# EAGLE board MJ808 clone - all driver - prod - 23mm (EAGLE 9.6.2)
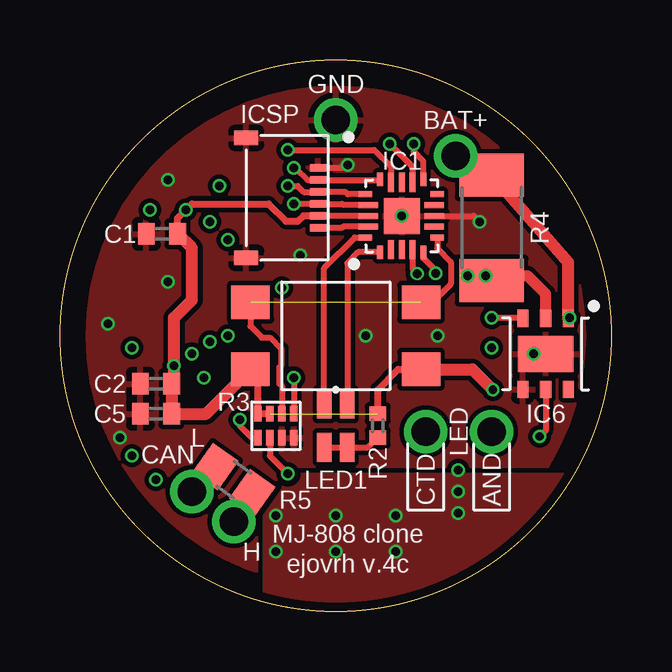
[diagram p0: board, top side]
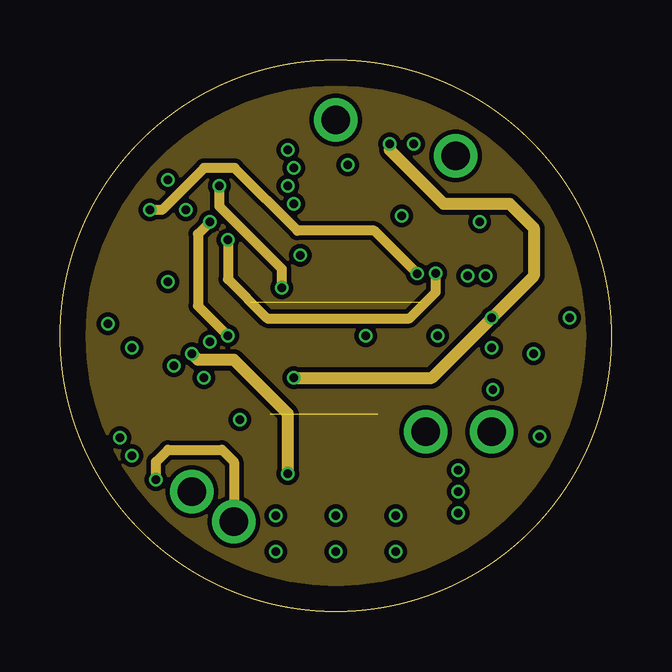
[diagram p1: board, inner layer Route2]
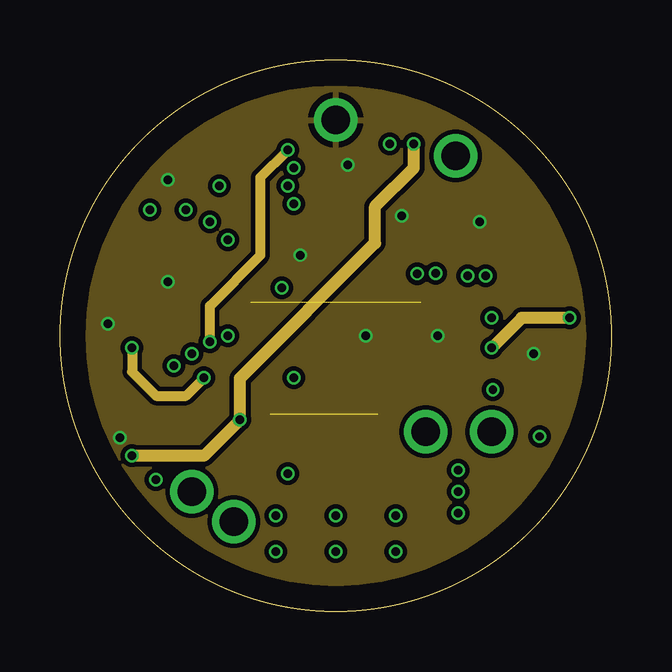
[diagram p2: board, inner layer Route15]
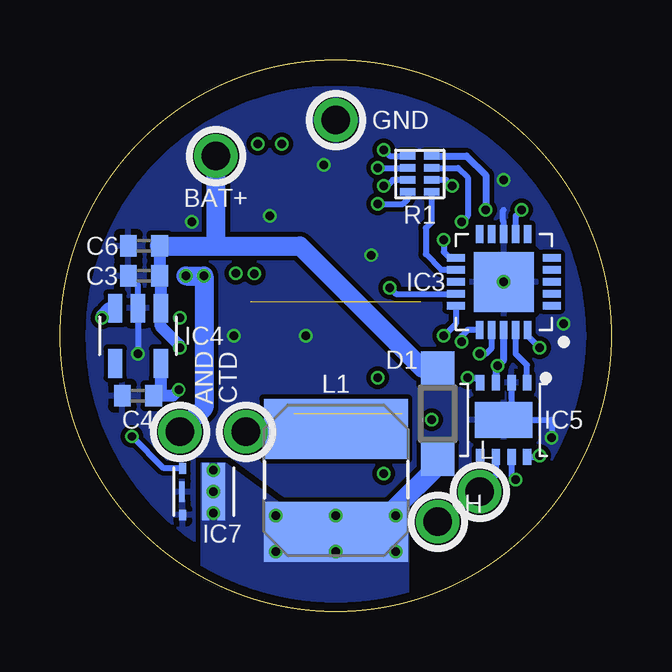
[diagram p3: board, bottom side, seen from below]

Size 23 x 23 mm. Coordinates in mm from the lower left corner, seen from the top.
Outline: circle at 11.5,11.5 radius 11.5
Copper layers (1*2*15*16): Top 0.035559375mm / dielectric 0.17018125mm / Route2 0.01778125mm / dielectric 47mil / Route15 0.01778125mm / dielectric 0.17018125mm / Bottom 0.035559375mm
Design rules "oshpark-4layer": minimum track width 5mil, minimum drill 10mil, track to track 5mil, track to pad 5mil, pad to pad 5mil, via to via 5mil, smd to smd 5mil, copper to edge 15mil, drill to drill 6mil, minimum pad ring 4mil, minimum via ring 4mil, stop-mask expansion 1.5mil, vias tented up to drill 0mil, thermal gap 10mil
Net classes: 0 GND: width 0.25 mm, drill 0.35 mm, clearance 0.19 mm; 1 BAT+: width 0.5 mm, drill 0.35 mm, clearance 0.19 mm; 2 5v0: width 0.3 mm, drill 0.35 mm, clearance 0.19 mm; 3 signal: width 0.25 mm, drill 0.35 mm, clearance 0.19 mm
bKeepout: area 0.5,0.5 to 22.5,22.5
bRestrict: area 4.5,8.8 to 5.5,9.2; area 3.5,6.8 to 5.5,7.2

## Footprints (pad centres in the part's own frame; a part is rotated, then mirrored left to right if it is on the bottom)
TH-1.2MM = drill 1.2 pad 1.8: TP$1 0,0
C0402 = smd 0.7 x 0.9: 1 -0.65,0; 2 0.65,0
SOD123 = smd 1.4 x 1.4: A 1.9,0; C -1.9,0
VQFN-20 = smd 0.55 x 0.25: 1 -1.52,0.9; 5 -1.52,-0.9; 11 1.52,-0.9; 15 1.52,0.9 | smd 0.8 x 0.25: 2 -1.4,0.45; 3 -1.4,0; 4 -1.4,-0.45; 12 1.4,-0.45; 13 1.4,0; 14 1.4,0.45 | smd 0.25 x 0.55: 6 -0.9,-1.48; 10 0.9,-1.48; 16 0.9,1.52; 20 -0.9,1.52 | smd 0.25 x 0.8: 7 -0.45,-1.35; 8 0,-1.35; 9 0.45,-1.35; 17 0.45,1.4; 18 0,1.4; 19 -0.45,1.4 | smd 1.5 x 1.5: GND 0,0
QFN20 = smd 0.3 x 0.75: !CS! 1,2; !RESET! 0.5,2; !RX0BF! 1,-2; !RX1BF! 0.5,-2; GND6 0,-2; OSC1 -0.5,-2; OSC2 -1,-2; RXCAN -1,2; TXCAN -0.5,2; VDD 0,2 | smd 0.75 x 0.3: !INT! 2,-1; !TX0RTS! -2,0.5; !TX1RTS! -2,0; !TX2RTS! -2,-1; CLKOUT -2,1; NC1 -2,-0.5; NC2 2,0; SCK 2,-0.5; SI 2,0.5; SO 2,1 | smd 2.5 x 2.5: GND 0,0
SOT-23-5L = smd 0.6 x 1.2: ADJ/NC -0.95,-1.15; EN -0.95,1.15; GND 0,1.15; IN 0.95,1.15; OUT 0.95,-1.15
DFN10 = smd 0.35 x 0.65: CANH -0.325,1.55; CANL 0.325,1.55; RXD 0.975,-1.55; SPLIT 0.975,1.55; STBY -0.975,1.55; TXD -0.975,-1.55; VDD 0.325,-1.55; VSS -0.325,-1.55 | smd 2.4 x 1.5: GND 0,0
TDFN-6-EP = smd 0.71 x 0.46: CSN -1.48,0; DIM -1.48,-0.94; DRV 1.48,0; GND1 1.48,-0.95; IN -1.48,0.94; VCC 1.48,0.95 | smd 1.5 x 2.3: GND 0,0
SC-70-6 = smd 0.45 x 0.3: 1D -0.975,0.725; 2D -0.975,0.075; 3G -0.975,-0.88; 4S 0.975,-0.88; 5D 0.975,0.075; 6D 0.975,0.725 | smd 1.5 x 0.95: D 0,0.4 | smd 0.87 x 0.23: S 0,-0.915
SMT = smd 0.3 x 0.7: 1 -1.25,1.27; 2 -0.75,1.27; 3 -0.25,1.27; 4 0.25,1.27; 5 0.75,1.27; 6 1.25,1.27 | smd 0.6 x 1: GND1 -2.5,-1.73; GND2 2.5,-1.73
SRN6045 = smd 2.5 x 6: 1 -2.175,0; 2 2.125,0
SMD = smd 1.2 x 0.6: 1 0.9,0.48; 2 -0.9,0.48; 3 -0.9,-0.48; 4 0.9,-0.48
0402-4R = smd 0.65 x 0.3: 1 -0.5,-0.75; 2 0.5,-0.75; 3 -0.5,-0.25; 4 0.5,-0.25; 5 -0.5,0.25; 6 0.5,0.25; 7 -0.5,0.75; 8 0.5,0.75
R0402 = smd 0.6 x 0.7: 1 -0.5,0; 2 0.5,0
R2010 = smd 1.8 x 2.7: 1 -2.2,0; 2 2.2,0
R0805 = smd 1.3 x 1.5: 1 -0.95,0; 2 0.95,0
SMD' = smd 1.6 x 1.4: 1 -3.556,-1.397; 2 3.556,-1.397; 3 -3.556,1.397; 4 3.556,1.397

## Placement (x,y rotation side)
AND  LED anode  [TH-1.2MM]  18,7.5 0 bottom
BAT+  LiIon + Terminal  [TH-1.2MM]  16.5,19 0 bottom
C1  0.1μF  [C0402]  4.25,15.75 180 top
C2  0.1μF  [C0402]  4,9.5 180 top
C3  1μF / 10V  [C0402]  19.5,14 180 bottom
C4  1μF  [C0402]  19.75,9 0 bottom
C5  0.1μF  [C0402]  4,8.25 180 top
C6  1μF / 10V  [C0402]  19.5,15.25 180 bottom
CTD  LED cathode  [TH-1.2MM]  15.25,7.5 0 bottom
D1  PMEG2010ER,115  [SOD123]  7.25,8.25 270 bottom
GND  LiIon - Terminal  [TH-1.2MM]  11.5,20.5 0 bottom
H  CAN high  [TH-1.2MM]  7.25,3.75 0 bottom
IC1  ATTINY4313-MMH  [VQFN-20]  14.25,16.5 90 top
IC3  MCP2515  [QFN20]  4.5,13.75 180 bottom
IC4  LDK320M50R  [SOT-23-5L]  19.75,11.5 0 bottom
IC5  MCP2561-2  [DFN10]  4.5,8 180 bottom
IC6  MAX16820  [TDFN-6-EP]  20.25,10.75 270 top
IC7  SQA470EEJ-T1_GE3  [SC-70-6]  17,5 270 bottom
ICSP  5034800600  [SMT]  9.5,17.25 270 top
L  CAN low  [TH-1.2MM]  5.5,5 0 bottom
L1  VLS6045EX-150M-CA - 15uH  [SRN6045]  11.5,5.5 90 bottom
LED1  IN-S85DATRG  [SMD]  11.5,7.75 270 top
R1  741X083331JP 330R  [0402-4R]  8,18.25 0 bottom
R2  10k  [R0402]  13.25,7.75 90 top
R3  741X083103JP 10k  [0402-4R]  9,7.75 90 top
R4  WSLT2010R2200FEB18 / 0.22Ohm 1W  [R2010]  18,16 90 top
R5  120  [R0805]  7.25,5.5 324.7 top
SW1  TL3305CF160QG  [SMD']  11.5,11.5 0 top

## Library data of the parts
AND BAT+ CTD GND H L = signal testpoint
C1-C6 = rcl; SPICEPREFIX: C
D1 = diode
IC1 = ATtiny4313 microcontroller; SPICEPREFIX: X
IC3 = MCP2515-I-ML - Standalonce CAN Controller with SPI Interface
IC4 = LDK320 5V LDO
IC5 = MCP2561-2 - High-Speed CAN Transceiver
IC6 = MAX16820 LED Driver, constant current
IC7 = SIA456DJ-T1-GE3  N-Fet
ICSP = 5034800600 FPC Connector
L1 = SparkFun-Coils; PROD_ID: NDUC-11627
LED1 = APHBM2012LSURKZGKC
R1 R3 = 74x-1133528 Resistor Array
R2 R4 R5 = rcl; SPICEPREFIX: R
SW1 = TL3305-844809 SPST-NO Tact Switch

## Nets
5V0 [5v0]: C1.1 C2.1 C4.2 C5.1 IC1.18 IC3.VDD IC4.OUT IC5.VDD ICSP.5 R1.8 R2.2 R3.6 R3.8 SW1.1 SW1.2
BAT+ [BAT+]: BAT+.TP$1 C3.1 C6.1 D1.C IC4.EN IC4.IN IC6.IN R4.2
CANH [signal]: H.TP$1 IC5.CANH R5.2
CANL [signal]: IC5.CANL L.TP$1 R5.1
CLOCKOUT [signal]: IC1.4 IC3.OSC1
DEBUGWIRE/RESET [signal]: IC1.19 ICSP.6
DIM_FRONT [signal]: IC1.12 IC6.DIM R3.2
DIM_FRONT_DRAIN: D1.A IC7.1D IC7.2D IC7.5D IC7.6D IC7.D L1.1
DIM_FRONT_GATE [signal]: IC6.DRV IC7.3G
GND: C1.2 C2.2 C3.2 C4.1 C5.2 C6.2 GND.TP$1 IC1.8 IC1.GND IC3.GND IC3.GND6 IC4.GND IC5.GND IC5.VSS IC6.GND IC6.GND1 IC7.4S IC7.S ICSP.1 ICSP.GND1 ICSP.GND2 R3.1 R3.3
GREEN_LED [signal]: IC1.20 LED1.3
ICSP_DI/MISO [signal]: IC1.15 ICSP.2 R1.5
ICSP_DO/MOSI [signal]: IC1.16 ICSP.3 R1.3
ICSP_SCK [signal]: IC1.17 ICSP.4 R1.1
INT [signal]: IC1.5 IC3.!INT!
LED [signal]: LED1.1 LED1.4 R2.1
LED_AN: AND.TP$1 IC6.CSN R4.1
LED_CA: CTD.TP$1 L1.2
N$1: IC1.9
N$2: IC1.7
N$3: IC1.13
N$4: IC1.10
N$5: IC1.3
N$6: IC1.2
RED_LED [signal]: IC1.1 LED1.2
RESET [signal]: IC3.!RESET! R3.5
RXCAN [signal]: IC3.RXCAN IC5.RXD
SPI_MISO [signal]: IC3.SO R1.6
SPI_MOSI: IC3.SI R1.4
SPI_SCK: IC3.SCK R1.2
SPI_SS [signal]: IC1.14 IC3.!CS! R1.7
STBY [signal]: IC1.11 IC5.STBY R3.7
SWITCH [signal]: IC1.6 R3.4 SW1.3 SW1.4
TXCAN [signal]: IC3.TXCAN IC5.TXD
VCC: IC6.VCC

## Tracks (layer width: path | path; a pad name or v marks a point on that pad's centre or on a via)
5V0  (via drill 0.35)  (1 unrouted)
  Top 0.254: IC1.18 ICSP.5
  Top 0.3: ICSP.5 10.15,16.5 9.92,16.27 9.43,16.27 8.7,17 5.5,17 v5.25,16.75 4.9,16.4 C1.1 | R3.6 R3.8 8.25,9.8 SW1.1 | R2.2 13.25,9.25 14.1,10.1 SW1.2
  Top 0.508: v18.05,9.25 17.2,10.1 SW1.2 15.06,10.06 | SW1.1 6.09,8.25 C5.1 C2.1 4.75,9.6 v4.75,10.25 4.75,12.25 5.5,13 5.5,15.15 C1.1
  Bottom 0.3: R1.8 6.05,19 5.25,18.2 v5.25,16.75 | IC3.VDD 4.5,10.5 v4.75,10.25 4.83,10.18 IC5.VDD
  Bottom 0.5: IC4.OUT 18.8,9.3 C4.2 18.3,9 v18.05,9.25
BAT+  (via drill 0.35)
  Top 0.5: 18,18 R4.2 21.19,14.55 IC6.IN 21.23,12.23 v21.25,12.25
  Top 0.508: BAT+.TP$1 16.75,18.75 18,18.75 18,18
  Route15 0.5: v21.25,12.25 19.25,12.25 v18,11
  Bottom 0.5: C6.1 C3.1 18.8,13.95 IC4.IN 18.8,11.89 18.05,11.14 18.05,11.05 v18,11 | IC4.EN 20.95,12.65 21.25,12.35 v21.25,12.25
  Bottom 0.8: 16.5,15.28 BAT+.TP$1 | D1.C 7.9,10.15 13,15.25 C6.1
CANH  (via drill 0.35)
  Top 0.25: H.TP$1 7.98,4.48 R5.2
  Route2 0.406: v4,5.5 4,6.25 4.5,6.75 6.75,6.75 7.25,6.25 H.TP$1
  Bottom 0.25: IC5.CANH 4.17,5.67 v4,5.5
CANL
  Top 0.25: L.TP$1 6.52,6.02 R5.1
  Bottom 0.25: IC5.CANL 4.83,5.67 L.TP$1
CLOCKOUT  (via drill 0.35)
  Top 0.25: v14.9,14.09 14.7,14.29 IC1.4
  Route2 0.406: v14.9,14.09 13.11,15.88 9.9,15.88 7.28,18.5 6,18.5 4.25,16.75 v3.75,16.75
  Bottom 0.254: IC3.OSC1 4,16.5 v3.75,16.75
DEBUGWIRE/RESET
  Top 0.254: ICSP.6 11.75,16 11.8,16.05 IC1.19
DIM_FRONT  (via drill 0.35)
  Top 0.254: IC1.12 14.7,18.55 v13.75,19.5 | IC6.DIM 19.29,12.25 v18,12.25 | v9.75,9.75 R3.2
  Route2 0.508: v13.75,19.5 13.75,19.25 16,17 18.75,17 19.75,16 19.75,14 v18,12.25 15.5,9.75 v9.75,9.75
DIM_FRONT_DRAIN  (via drill 0.35)
  Bottom 0.254: IC7.D 16.93,5 IC7.2D
  Bottom 0.8: 9.03,4.33 7.25,6.1 D1.A
  other vias: 16.6,5 16.6,4.1 16.6,5.9 14,4 14,2.5 11.5,2.5 11.5,4 9,4 9,2.5
  pour Top (isolate 0.254, rank 2, no thermals): 8.5,5.75 22,5.75 22,-0.62 8.5,-0.62
  pour Bottom (isolate 0.254, rank 2, no thermals): 8.5,-0.25 8.5,4.5 13.82,4.5 16.12,6.18 17.09,6.18 17.09,-0.25
DIM_FRONT_GATE  (via drill 0.35)
  Top 0.254: IC6.DRV 20.25,7.55 v20,7.3
  Bottom 0.254: IC7.3G 18.68,5.97 v20,7.3
GND  (via drill 0.35)
  Top 0.254: v12,18.63 11.9,18.63 11.77,18.5 ICSP.1 | IC1.8 17.25,16.5 v17.5,16.25
  Bottom 0.254: IC5.VSS 4.17,8 2.5,8 v2.5,7.25 | C3.2 19.75,13.6 IC4.GND v19.75,10.75 | IC3.GND6 4.5,16.25 4.53,16.28 4.53,16.72 4.5,16.75
  other vias: 4.5,18 10.02,14.86 14.25,16.5 4.5,13.75 2,12 15.75,11.5 12.75,11.5
  pour Route15: 1.12,11.5 arc-90 11.5,21.88 arc-90 21.88,11.5 arc-90 11.5,1.12 arc-90
  pour Top (rank 3): 1.12,11.5 arc-90 11.5,21.88 arc-90 21.88,11.5 arc-90 11.5,1.12 arc-90
  pour Bottom (rank 3): 1.12,11.5 arc-90 11.5,21.88 arc-90 21.88,11.5 arc-90 11.5,1.12 arc-90
GND1
  pour Route2: 1.12,11.5 arc-90 11.5,21.88 arc-90 21.88,11.5 arc-90 11.5,1.12 arc-90
GREEN_LED
  Top 0.25: LED1.3 11.02,14.32 12.3,15.6 IC1.20
ICSP_DI/MISO  (via drill 0.35)
  Top 0.25: v9.75,18.5 9.81,18.5 10.31,17.99 ICSP.2
  Top 0.254: IC1.15 13.33,18 ICSP.2
  Bottom 0.25: v9.75,18.5 R1.5
ICSP_DO/MOSI  (via drill 0.35)
  Top 0.25: v9.5,17.75 9.91,17.75 10.16,17.5 ICSP.3
  Top 0.254: ICSP.3 11.9,17.5 12,17.4 IC1.16
  Bottom 0.25: R1.3 9.12,18 9.37,17.75 v9.5,17.75
ICSP_SCK  (via drill 0.35)
  Top 0.25: IC1.17 11.82,16.95 11.77,17 ICSP.4 v9.75,17
  Bottom 0.25: R1.1 8.5,17.2 8.7,17 v9.75,17
INT  (via drill 0.35)
  Top 0.25: v15.67,14.1 15.67,14.21 15.15,14.73 IC1.5
  Route2 0.406: v15.67,14.1 15.67,13.32 14.57,12.22 8.64,12.22 7,13.86 v7,15.5
  Bottom 0.254: v7,15.5 7,15 6.75,14.75 IC3.!INT!
LED
  Top 0.25: LED1.4 LED1.1 12.85,6.85 R2.1
LED_AN  (via drill 0.35)
  Top 0.254: R4.1 17.8,14 v17.75,14
  Top 0.45: IC6.CSN 20.25,13.25 19.5,14 v17.75,14
  Bottom 0.8: v17.75,14 v17,14 17,8.5 AND.TP$1
LED_CA
  Bottom 0.8: L1.2 11.62,7.5 CTD.TP$1
RED_LED
  Top 0.25: IC1.1 12.43,14.98 11.98,14.53 LED1.2
RESET  (via drill 0.35)
  Top 0.25: R3.5 8.75,6.5 v9.5,5.75
  Route2 0.508: v9.5,5.75 9.5,8.25 7.25,10.5 5.75,10.5 v5.5,10.75
  Bottom 0.25: v5.5,10.75 5.25,10.75 5,11 IC3.!RESET!
RXCAN  (via drill 0.35)
  Route15 0.406: v3,11 3,10 4,9 5.25,9 v6,9.75
  Bottom 0.25: v6,9.75 5.67,9.75 IC5.RXD | IC3.RXCAN 3.5,11.5 v3,11
SPI_MISO  (via drill 0.35)
  Route2 0.406: v6.25,16.25 5.75,15.75 5.75,12.75 v7,11.5
  Bottom 0.25: R1.6 6.4,18.5 6,18.1 6,16.5 | v7,11.5 6.5,12 IC3.SO
  Bottom 0.254: 6,16.5 v6.25,16.25
SPI_MOSI  (via drill 0.35)
  Route2 0.406: v9.25,13.5 9.25,14.29 6.65,16.89 v6.65,17.75
  Bottom 0.25: v6.65,17.75 6.9,18 R1.4
  Bottom 0.254: v9.25,13.5 9,13.25 IC3.SI
SPI_SCK
  Bottom 0.254: IC3.SCK 7.1,14.25 7.75,14.9 7.75,16 7.5,16.25 R1.2
SPI_SS  (via drill 0.35)
  Top 0.25: IC1.14 13.8,18.55 13.1,19.25 9.55,19.25
  Top 0.254: v9.5,19.25 9.55,19.25
  Route15 0.406: v9.5,19.25 8.35,18.1 8.35,14.85 6.25,12.75 v6.25,11.25
  Bottom 0.25: v9.5,19.25 9.25,19 R1.7 | IC3.!CS! 6,11.75 6.25,11.5 v6.25,11.25
STBY  (via drill 0.35)
  Top 0.25: 15.15,18.77 14.75,19.17 v14.75,19.5
  Top 0.254: IC1.11 15.15,18.77 | R3.7 8,7.25 7.5,7.75 v7.5,8
  Route15 0.508: v3,6.5 6,6.5 v7.5,8 7.5,9.72 13.14,15.36 13.14,16.89 14.75,18.5 v14.75,19.5
  Bottom 0.254: IC5.STBY 3.05,6.45 v3,6.5
SWITCH  (1 unrouted)
  Top 0.25: IC1.6 15.73,15.15 16.3,14.58 16.3,13.65 15.55,12.9 SW1.4 | SW1.3 7.94,11.9 8.42,11.42 8.75,11.42 9.22,10.95 9.22,10.25 9.15,10.18 9.15,9.5 9.25,9.4 R3.4
TXCAN
  Bottom 0.25: IC5.TXD 3.53,10.28 4,10.75 IC3.TXCAN

## Text on the board
tPlace: GND | BAT+ | L | LED | MJ-808 clone | H | ejovrh v.4c
tNames: CAN
bNames: CTD | AND